# Altium PCB PCB_main.PcbDoc
Units mil, origin at the board's own origin, x right, y up, seen from the top; angles counter-clockwise.
Board outline 3937.01 x 3937.01 mil, 2 copper layers (Top Layer, Bottom Layer); 22 components, 23 nets, 120 pads, 2 vias.
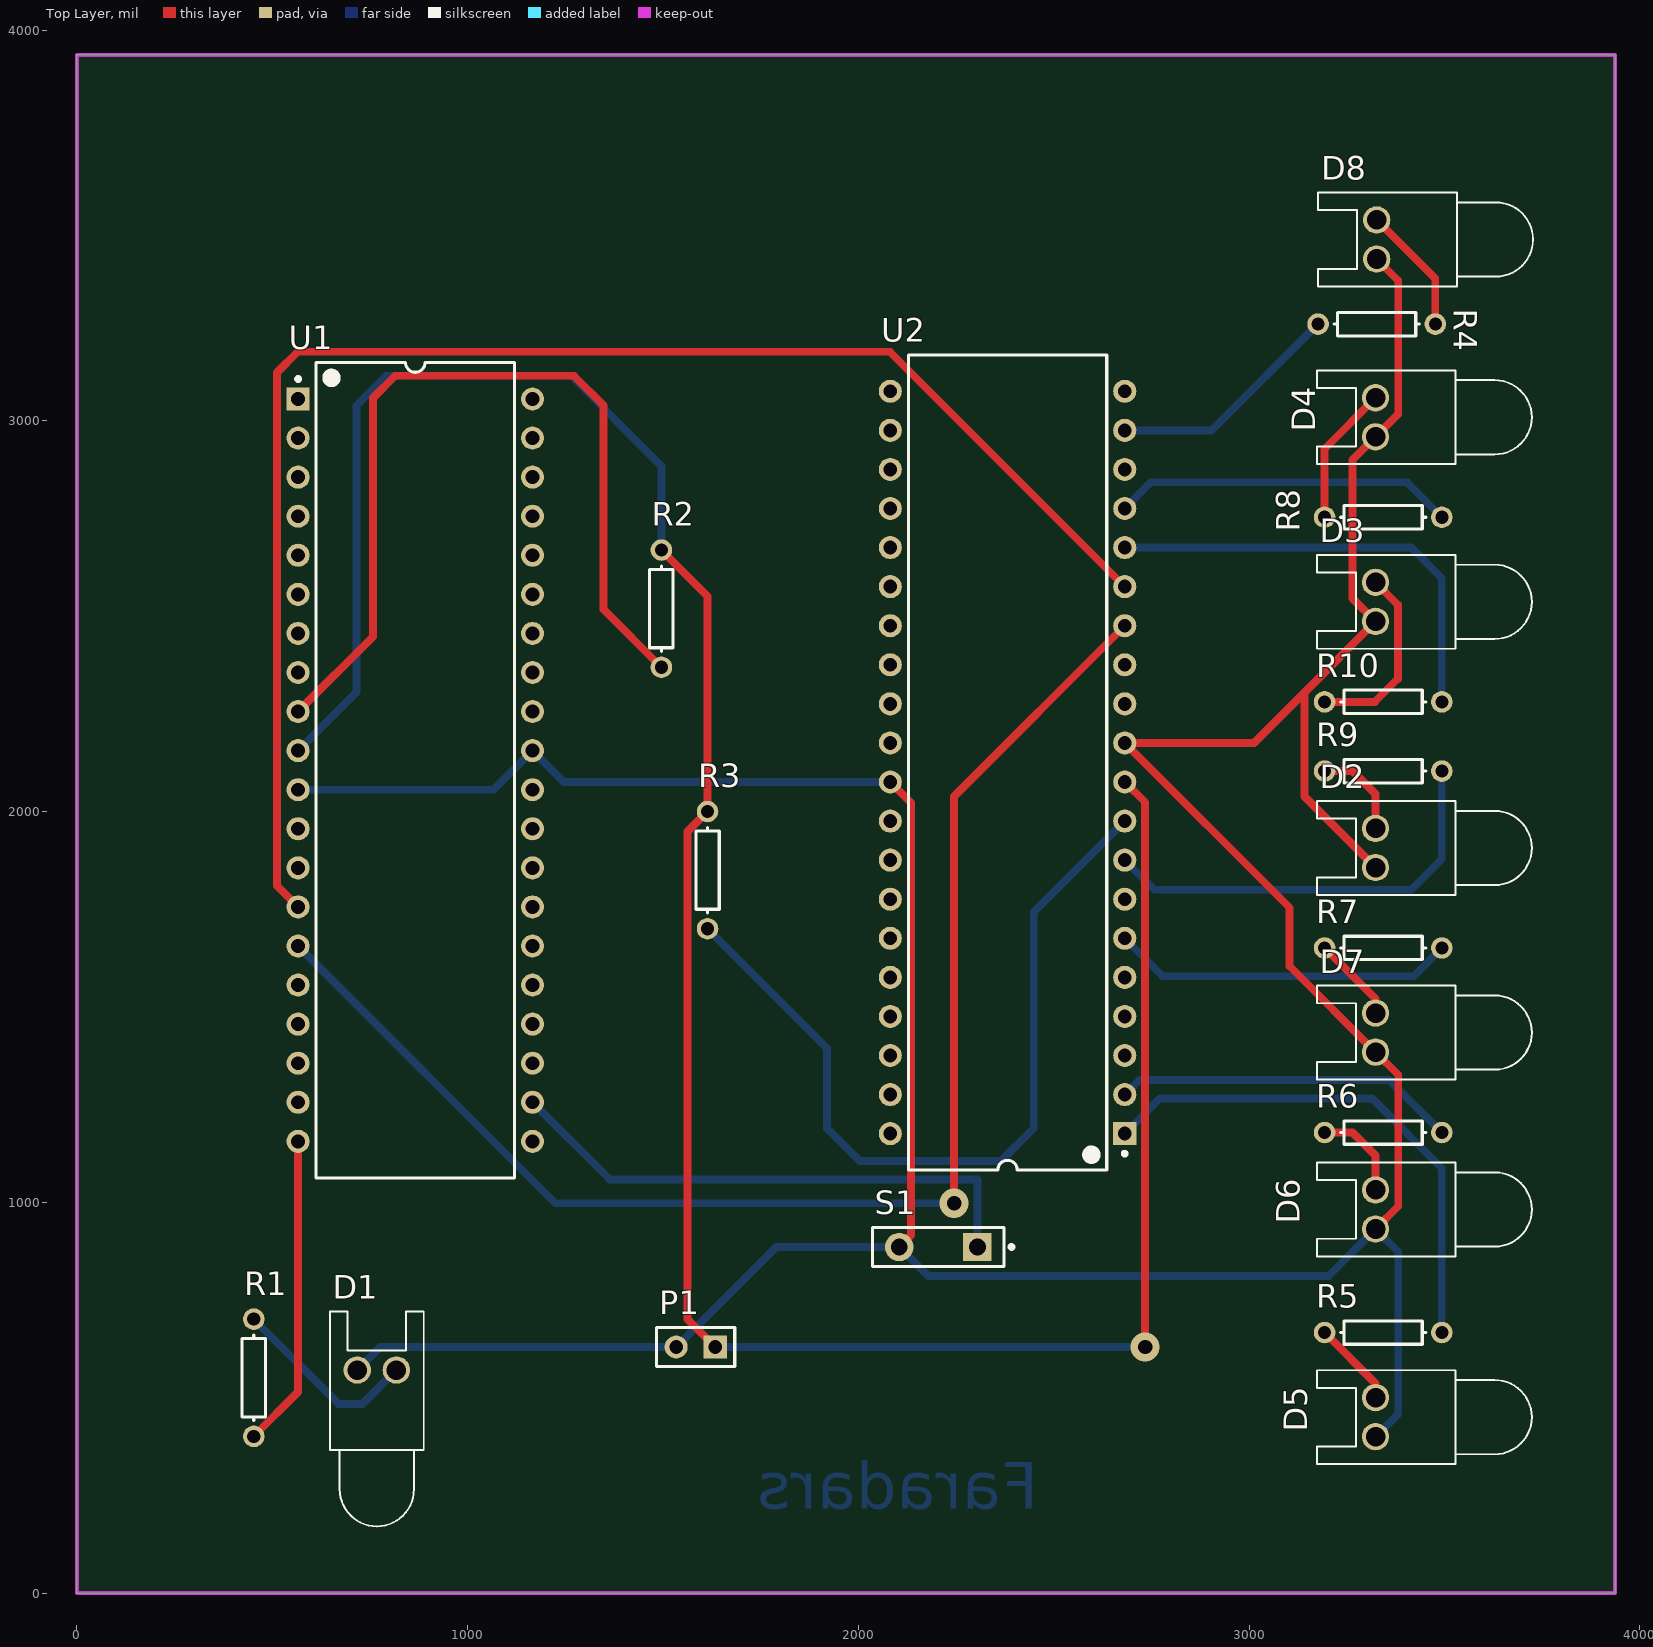
[diagram p0: Top Layer view]
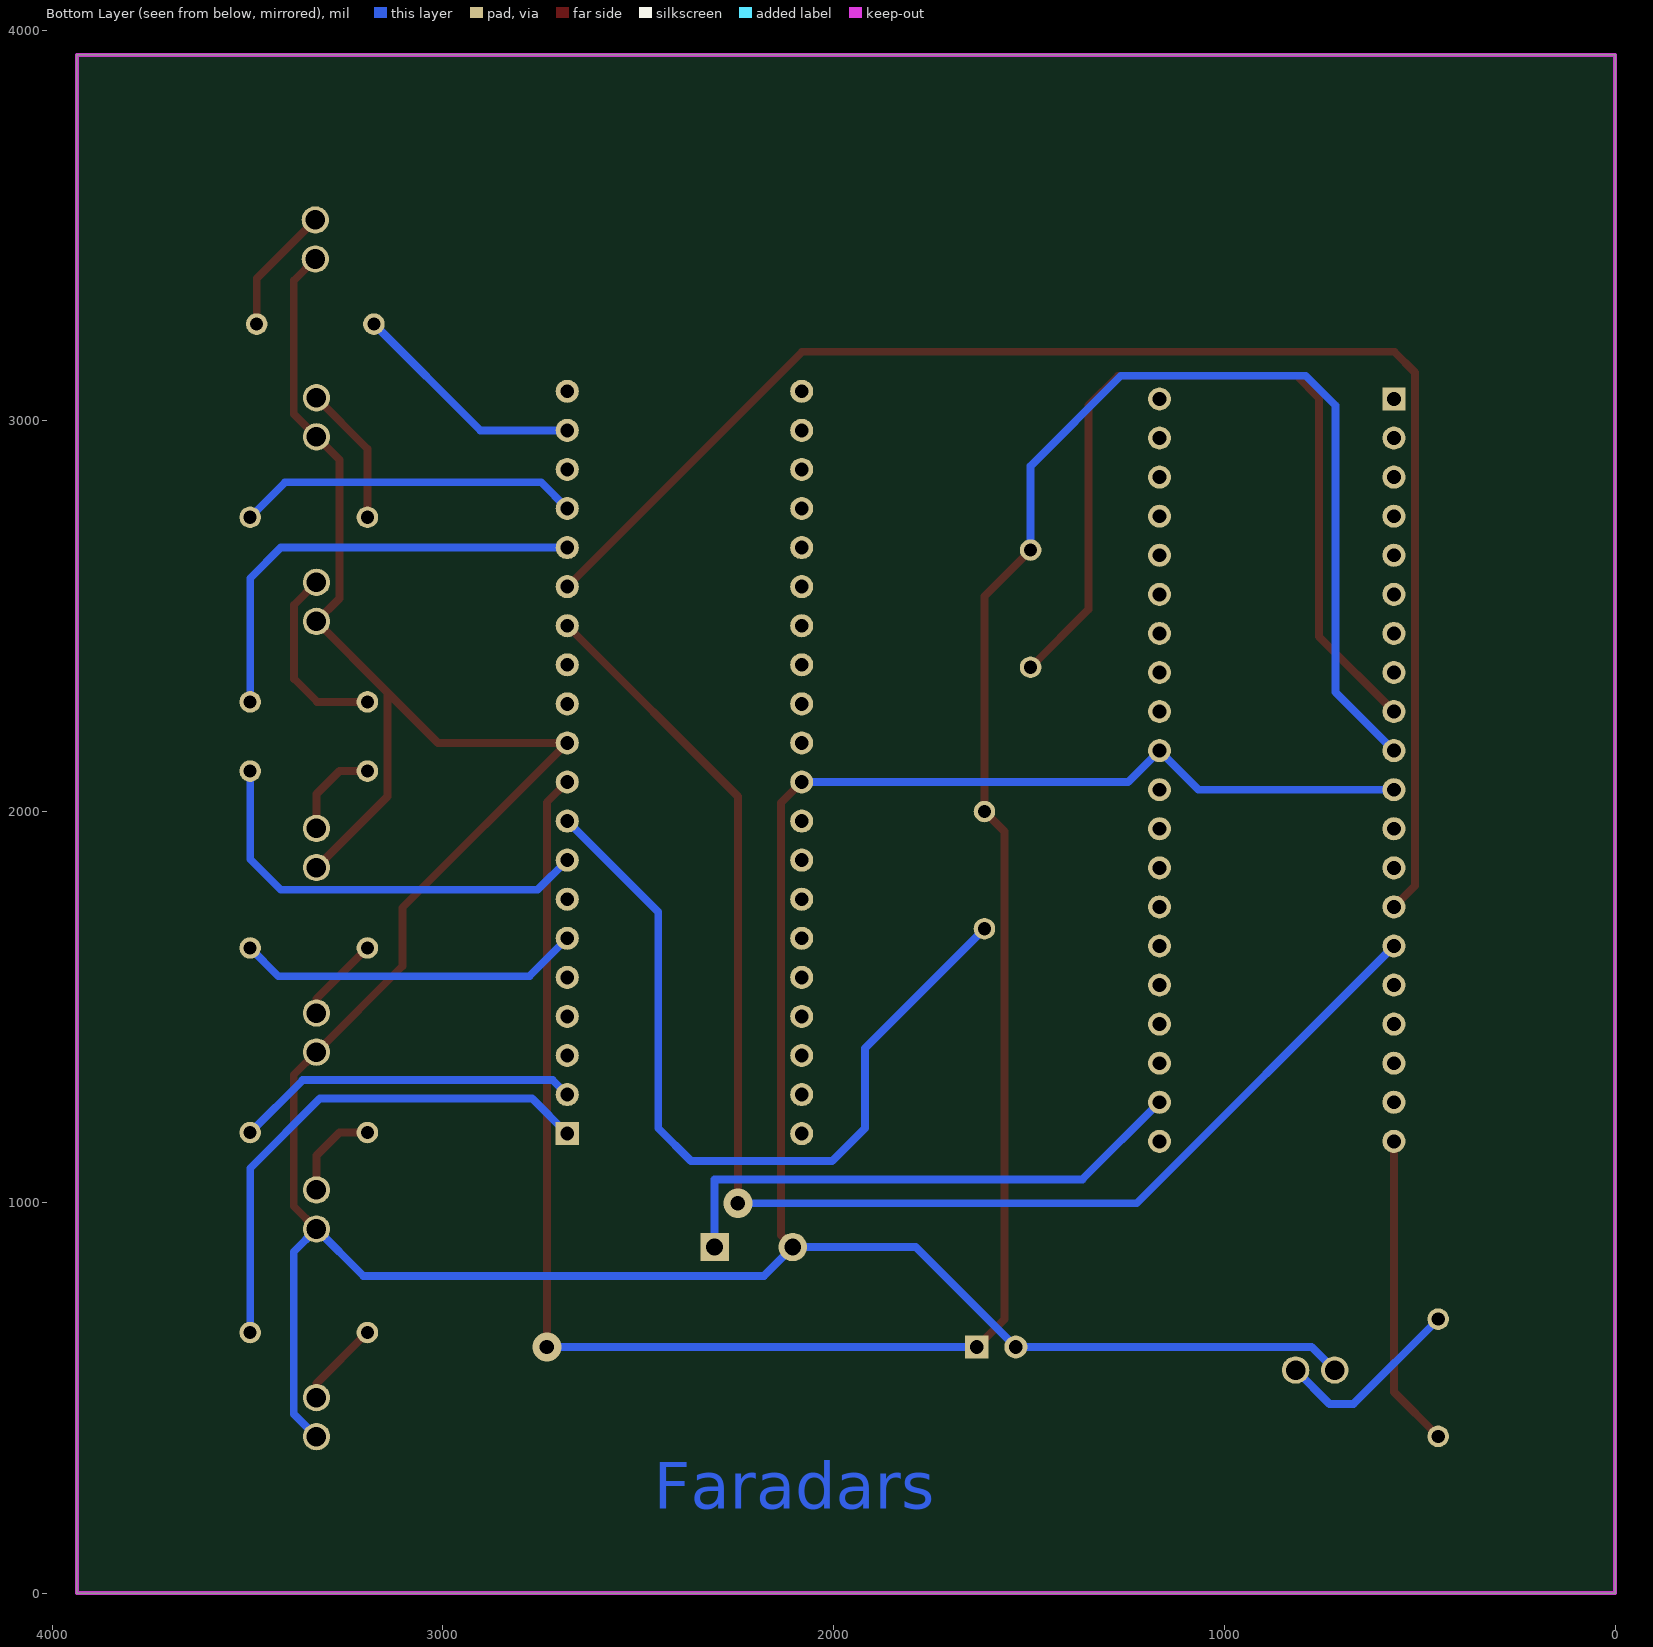
[diagram p1: Bottom Layer view, seen from below]

## Layer stack, top to bottom
Top Solder: solder mask 0.4, Solder Resist, Dk 3.5
Top Layer: signal copper 1.4
Dielectric 1: dielectric 12.6, FR-4, Dk 4.8
Bottom Layer: signal copper 1.4
Bottom Solder: solder mask 0.4, Solder Resist, Dk 3.5

## Board outline
0,0 3937.01,0 3937.01,3937.01 0,3937.01

## Design rules (kind name [scope] priority, off if disabled: settings)
Clearance [All] p1: gap=12
HoleSize [All] p1: absolutevalues=TRUE maxlimit=100 minlimit=50 maxpercent=80.000 minpercent=20.000
PolygonConnect [All] p1: connectstyle=Relief reliefconductorwidth=10 reliefentries=4 polygonreliefangle="90 Angle" airgapwidth=10
RoutingVias [All] p1: holewidth=37 width=75 viastyle="Through Hole" minholewidth=28 minwidth=50 maxholewidth=100 maxwidth=100
SolderMaskExpansion [All] p1: expansion=4
Width [All] p1: maxlimit=196.85 minlimit=12 preferedwidth=20
29 further rules are at their usual default settings.

## Components (designator, comment, footprint, x,y, rotation, side; value= is the part's Value field where it differs from the comment)
D1 "LED0" LED-0 767.72,570.87 r0 top
D2 "LED0" LED-0 3323.78,1907.11 r90 top (schematic designator D5)
D3 "LED0" LED-0 3323.78,2537.03 r90 top (schematic designator D4)
D4 "LED0" LED-0 3323.78,3009.47 r90 top (schematic designator D2)
D5 "LED0" LED-0 3323.78,450.42 r90 top (schematic designator D8)
D6 "LED0" LED-0 3323.78,981.92 r90 top (schematic designator D7)
D7 "LED0" LED-0 3323.78,1434.67 r90 top (schematic designator D6)
D8 "LED0" LED-0 3326.77,3464.57 r90 top (schematic designator D3)
P1 "Header 2" HDR1X2 1633.86,629.92 r180 top
R1 "Res1" AXIAL-0.3 452.76,551.18 r90 top
R2 "Res1" AXIAL-0.3 1496.06,2519.69 r270 top
R3 "Res1" AXIAL-0.3 1614.17,1850.39 r270 top (schematic designator R4)
R4 "Res1" AXIAL-0.3 3326.77,3248.03 r0 top (schematic designator R5)
R5 "Res1" AXIAL-0.3 3343.47,666.96 r180 top (schematic designator R10)
R6 "Res1" AXIAL-0.3 3343.47,1178.77 r180 top (schematic designator R9)
R7 "Res1" AXIAL-0.3 3343.47,1651.21 r180 top (schematic designator R8)
R8 "Res1" AXIAL-0.3 3343.47,2753.57 r180 top (schematic designator R3)
R9 "Res1" AXIAL-0.3 3343.47,2103.96 r180 top (schematic designator R7)
R10 "Res1" AXIAL-0.3 3343.47,2281.13 r180 top (schematic designator R6)
S1 "SW-PB" SPST-2 2204.72,885.83 r180 top
U1 "ATmega32L-8PU" 40P6 866.14,2106.3 r0 top
U2 "ATmega32L-8PU" 40P6 2381.89,2125.98 r180 top

## Footprints (in the part's own frame and the unit in brackets; to place one, negate y for a bottom-side part, rotate by r counter-clockwise, add the part's x,y. Pads: shape width x height; smd on the part's side, far side on the other; paste and mask are expansions set on the pad)
40P6 [mm] "40-Pin Ceramic Dual In-Line Package (CerDIP)"
  rect 1.5x1.5 hole 0.9: 1(-7.62,24.13)
  round 1.5 hole 0.9: 2(-7.62,21.59) 3(-7.62,19.05) 4(-7.62,16.51) 5(-7.62,13.97) 6(-7.62,11.43) 7(-7.62,8.89) 8(-7.62,6.35) 9(-7.62,3.81) 10(-7.62,1.27) 11(-7.62,-1.27) 12(-7.62,-3.81) 13(-7.62,-6.35) 14(-7.62,-8.89) 15(-7.62,-11.43) 16(-7.62,-13.97) 17(-7.62,-16.51) 18(-7.62,-19.05) 19(-7.62,-21.59) 20(-7.62,-24.13) 21(7.62,-24.13) 22(7.62,-21.59) 23(7.62,-19.05) 24(7.62,-16.51) 25(7.62,-13.97) 26(7.62,-11.43) 27(7.62,-8.89) 28(7.62,-6.35) 29(7.62,-3.81) 30(7.62,-1.27) 31(7.62,1.27) 32(7.62,3.81) 33(7.62,6.35) 34(7.62,8.89) 35(7.62,11.43) 36(7.62,13.97) 37(7.62,16.51) 38(7.62,19.05) 39(7.62,21.59) 40(7.62,24.13)
  silkscreen extent -7.74,-26.5 6.45,26.5, body extent -7.05,-26.47 7.05,26.47, height 4.83
AXIAL-0.3 [mm] "Axial Device, Thru-Hole; 2 Leads; 0.3 in Pin Spacing"
  round 1.4 hole 0.85: 1(-3.81,0) 2(3.81,0)
  silkscreen extent -2.77,-0.76 2.77,0.76
HDR1X2 [mm] "Connector; Header; 2 Position"
  rect 1.5x1.5 hole 0.9: 1(0,0)
  round 1.5 hole 0.9: 2(2.54,0)
  silkscreen extent -1.27,-1.27 3.81,1.27
LED-0 [mil] "LED; 2 Leads"
  round 70 hole 50: 1(50,0) 2(-50,0)
  silkscreen extent -120,-400 120,150
SPST-2 [mm] "Switch; 2 Leads"
  rect 1.85x1.85 hole 1.1: 1(-2.54,0)
  round 1.85 hole 1.1: 2(2.54,0)
  silkscreen extent -4.89,-1.27 4.28,1.27

## Part data
D1 D2 D3 D4 D5 D6 D7 D8: "Typical INFRARED GaAs LED"
P1: "Header, 2-Pin"
R1 R2 R3 R4 R5 R6 R7 R8 R9 R10: "Resistor"
S1: "Switch"
U1 U2: "8-bit AVR Microcontroller, 2.7-5.5V, 8MHz, 32KB Flash, 1024 Bytes EEPROM, 2KB SRAM, 40-pin PDIP, Industrial Grade (-40°C to 85°C)"

## Via types
v1: diameter 75, hole 37, Top Layer to Bottom Layer, 2 vias

## Nets (pads, with @x,y where several pads share a name; then routed paths per layer and width w, separated by ;. In a path a pad name is that pad's centre, name@x,y a point inside that pad or via, vN(x,y) a via of type N, cw(c..) or ccw(c..) an arc to the next point about the centre after c; other vN are vias at no path point)
GND: D1.2 D2.2 D3.2 D4.2 D5.2 D6.2 D7.2 D8.2 P1.2 S1.2 U1.11 U1.31 U2.11 U2.31 | length 10087.2
  Top Layer w20: U2.31 2135,2022.88 2135,916.1 S1.2 ; D6.2 3382,990.14 3382,1326.45 D7.2 3104,1604.45 3104,1753.88 U2.11 3012.74,2175.99 3142,2305.25 ; D2.2 3142,2038.89 3142,2305.25 ; D8.2 3382,3359.34 3382,3017.69 D4.2 3265,2900.69 3265,2545.81 D3.2 3142,2305.25
  Bottom Layer w20: U1.11 1066.14,2056.3 U1.31 1246.46,2075.99 U2.31 ; D1.2 776.78,629.92 P1.2 1789.76,885.83 S1.2 2178.55,812 3203.86,812 D6.2 3382,873.7 3382,458.64 D5.2
NetD1_1: D1.1 R1.2 | length 490.9
  Bottom Layer w20: R1.2 669.94,484 730.85,484 D1.1
NetD2_1: D4.1 R8.2 | length 359.9
  Top Layer w20: R8.2 3193.47,2929.16 D4.1
NetD3_1: D8.1 R4.2 | length 328.7
  Top Layer w20: D8.1 3476.77,3364.57 R4.2
NetD4_1: D3.1 R10.2 | length 482.7
  Top Layer w20: R10.2 3322.13,2281.13 3381,2340 3381,2529.81 D3.1
NetD5_1: D2.1 R9.2 | length 242.7
  Top Layer w20: R9.2 3265,2103.96 3323.78,2045.18 D2.1
NetD6_1: D7.1 R7.2 | length 220.5
  Top Layer w20: R7.2 3323.78,1520.89 D7.1
NetD7_1: D6.1 R6.2 | length 242.7
  Top Layer w20: R6.2 3265,1178.77 3323.78,1119.99 D6.1
NetD8_1: D5.1 R5.2 | length 220.5
  Top Layer w20: R5.2 3323.78,536.64 D5.1
NetR1_1: R1.1 U1.20 | length 802.1
  Top Layer w20: R1.1 566.14,514.57 U1.20
NetR2_2: R2.2 U1.9 | length 2258.9
  Top Layer w20: U1.9 758,2448.15 758,3059 815,3116 1272,3116 1348,3040 1348,2517.75 R2.2
NetR3_1: R8.1 U2.17 | length 876.4
  Bottom Layer w20: U2.17 2748.9,2843 3404.04,2843 R8.1
NetR4_2: R3.2 U2.9 | length 2118.1
  Bottom Layer w20: R3.2 1920,1394.57 1920,1190 2004,1106 2365,1106 2449,1190 2449,1743.1 U2.9
NetR5_1: R4.1 U2.19 | length 607.6
  Bottom Layer w20: U2.19 2904.72,2975.99 R4.1
NetR6_1: R10.1 U2.16 | length 1160.5
  Bottom Layer w20: U2.16 3415,2675.99 3493.47,2597.52 R10.1
NetR7_1: R9.1 U2.8 | length 1101
  Bottom Layer w20: U2.8 2757.88,1800 3415,1800 3493.47,1878.47 R9.1
NetR8_1: R7.1 U2.6 | length 881.7
  Bottom Layer w20: U2.6 2778.88,1579 3421.26,1579 R7.1
NetR9_1: R6.1 U2.2 | length 882.5
  Bottom Layer w20: U2.2 2718.9,1313 3359.24,1313 R6.1
NetR10_1: R5.1 U2.1 | length 1343.4
  Bottom Layer w20: U2.1 2771.9,1266 3315,1266 3493.47,1087.53 R5.1
NetS1_1: S1.1 U1.22 | length 1393.1
  Bottom Layer w20: U1.22 1363.44,1059 2304.12,1059 2304.72,1058.39 S1.1
NetU1_14: U1.14 U2.15 | length 3830.9
  Top Layer w20: U1.14 512,1810.44 512,3124 565,3177 2080.88,3177 U2.15
NetU1_15: U1.15 U2.14 | length 3610.5
  Top Layer w20: v1(2245,998) 2245,2039.1 U2.14
  Bottom Layer w20: U1.15 1224.44,998 v1(2245,998)
VCC: P1.1 R2.1 R3.1 U1.10 U2.10 | length 6775.3
  Top Layer w20: R2.1 1614.17,2551.57 R3.1 1563,1949.22 1563,700.78 P1.1 ; U2.10 2734,2023.88 v1(2734,629.92)
  Bottom Layer w20: U1.10 716,2306.15 716,3040 792,3116 1265,3116 1496.06,2884.94 R2.1 ; P1.1 v1(2734,629.92)
pads on no net: U1.1 U1.2 U1.3 U1.4 U1.5 U1.6 U1.7 U1.8 U1.12 U1.13 U1.16 U1.17 U1.18 U1.19 U1.21 U1.23 U1.24 U1.25 U1.26 U1.27 U1.28 U1.29 U1.30 U1.32 U1.33 U1.34 U1.35 U1.36 U1.37 U1.38 U1.39 U1.40 U2.3 U2.4 U2.5 U2.7 U2.12 U2.13 U2.18 U2.20 U2.21 U2.22 U2.23 U2.24 U2.25 U2.26 U2.27 U2.28 U2.29 U2.30 U2.32 U2.33 U2.34 U2.35 U2.36 U2.37 U2.38 U2.39 U2.40

## Polygon pours and split planes (outlines as drawn)
GND on Bottom Layer "P1" (solid, remove dead copper, shelved, pour order 4): 0,0 0,3937.01 3937.01,3937.01 3937.01,0

## Keep-outs
Keep-Out Layer:
  the board outline again, w10

## Other copper
Bottom Layer:
  text "Faradars" at 2460.63,216.54 h120

## Dimensions
0,3937.01 to 0,0 on Keep-Out Layer
0,3937.01 to 3937.01,3937.01 on Keep-Out Layer